# Altium PCB PCB1.PcbDoc
Units mm, origin at the board's own origin, x right, y up, seen from the top; angles counter-clockwise.
Board outline 100 x 70 mm, 2 copper layers (Top Layer, Bottom Layer); 33 components, 10 nets, 208 pads, 0 vias.
Unrouted connection lines stored in the file: 54.
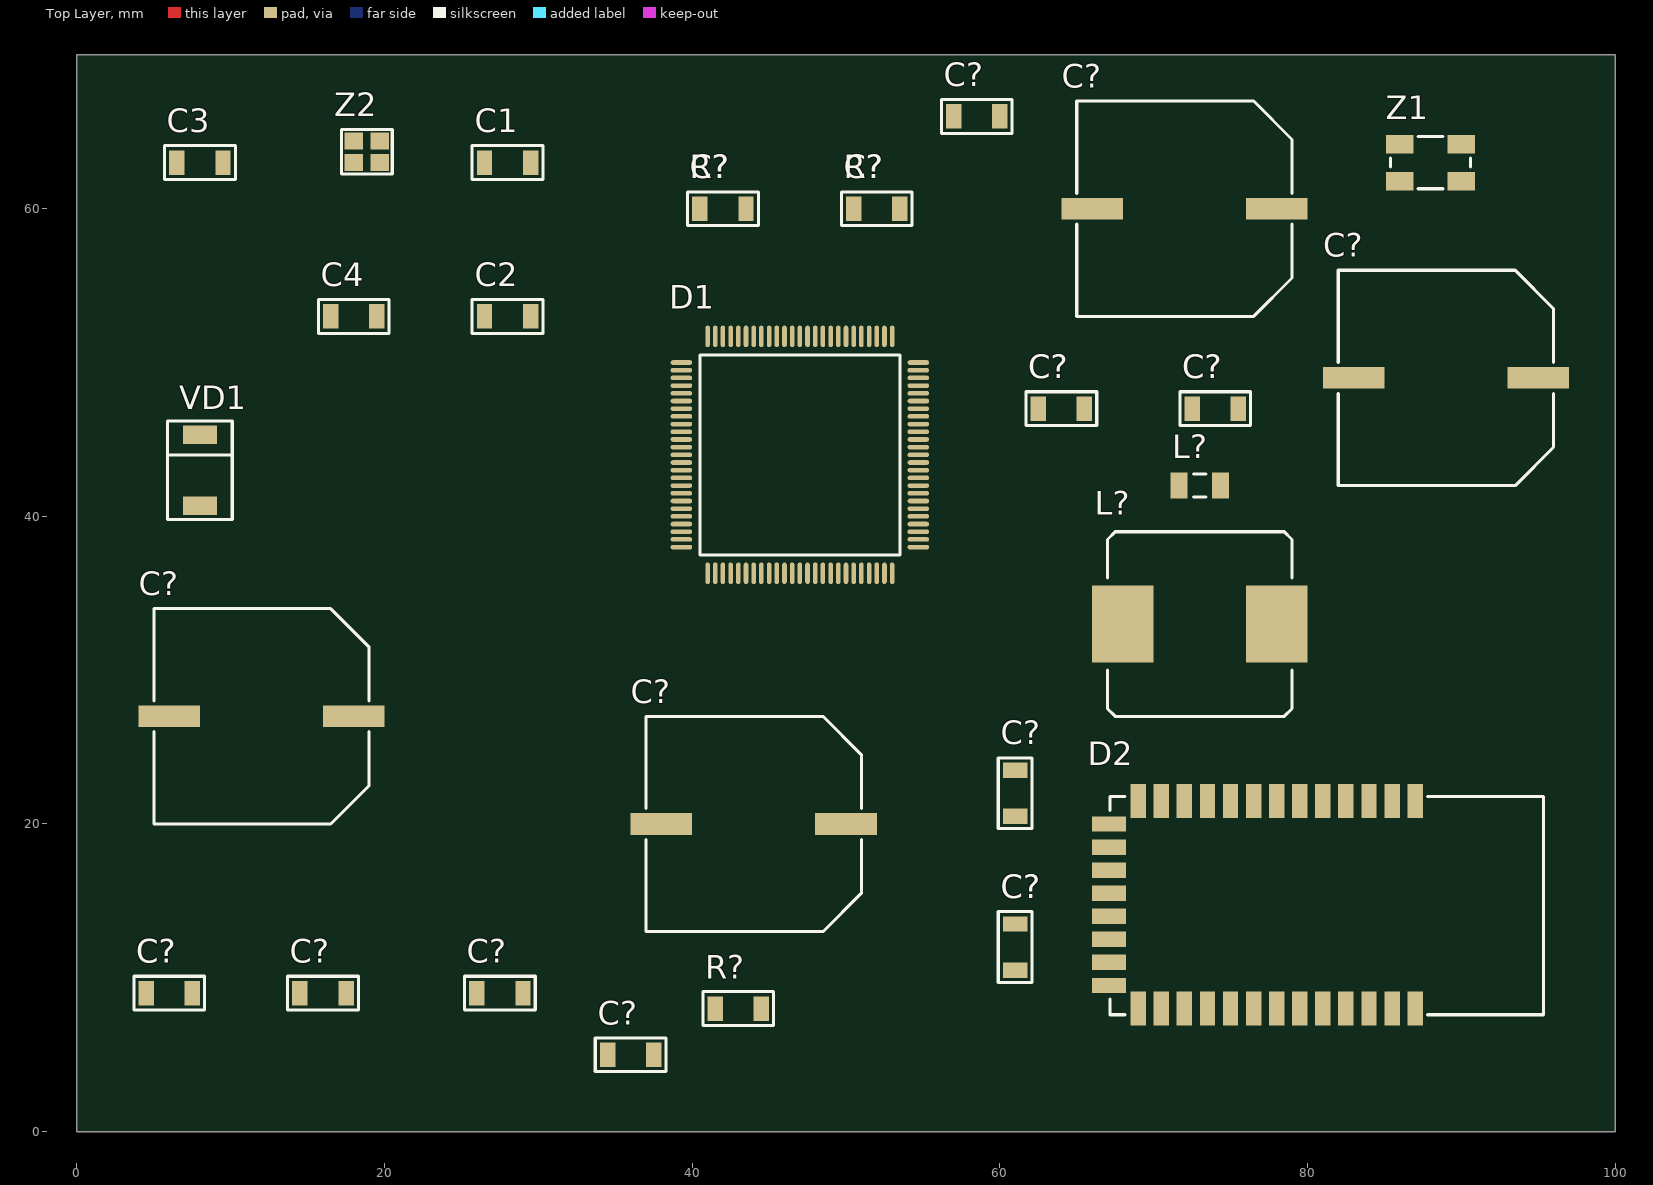
[diagram p0: Top Layer view]
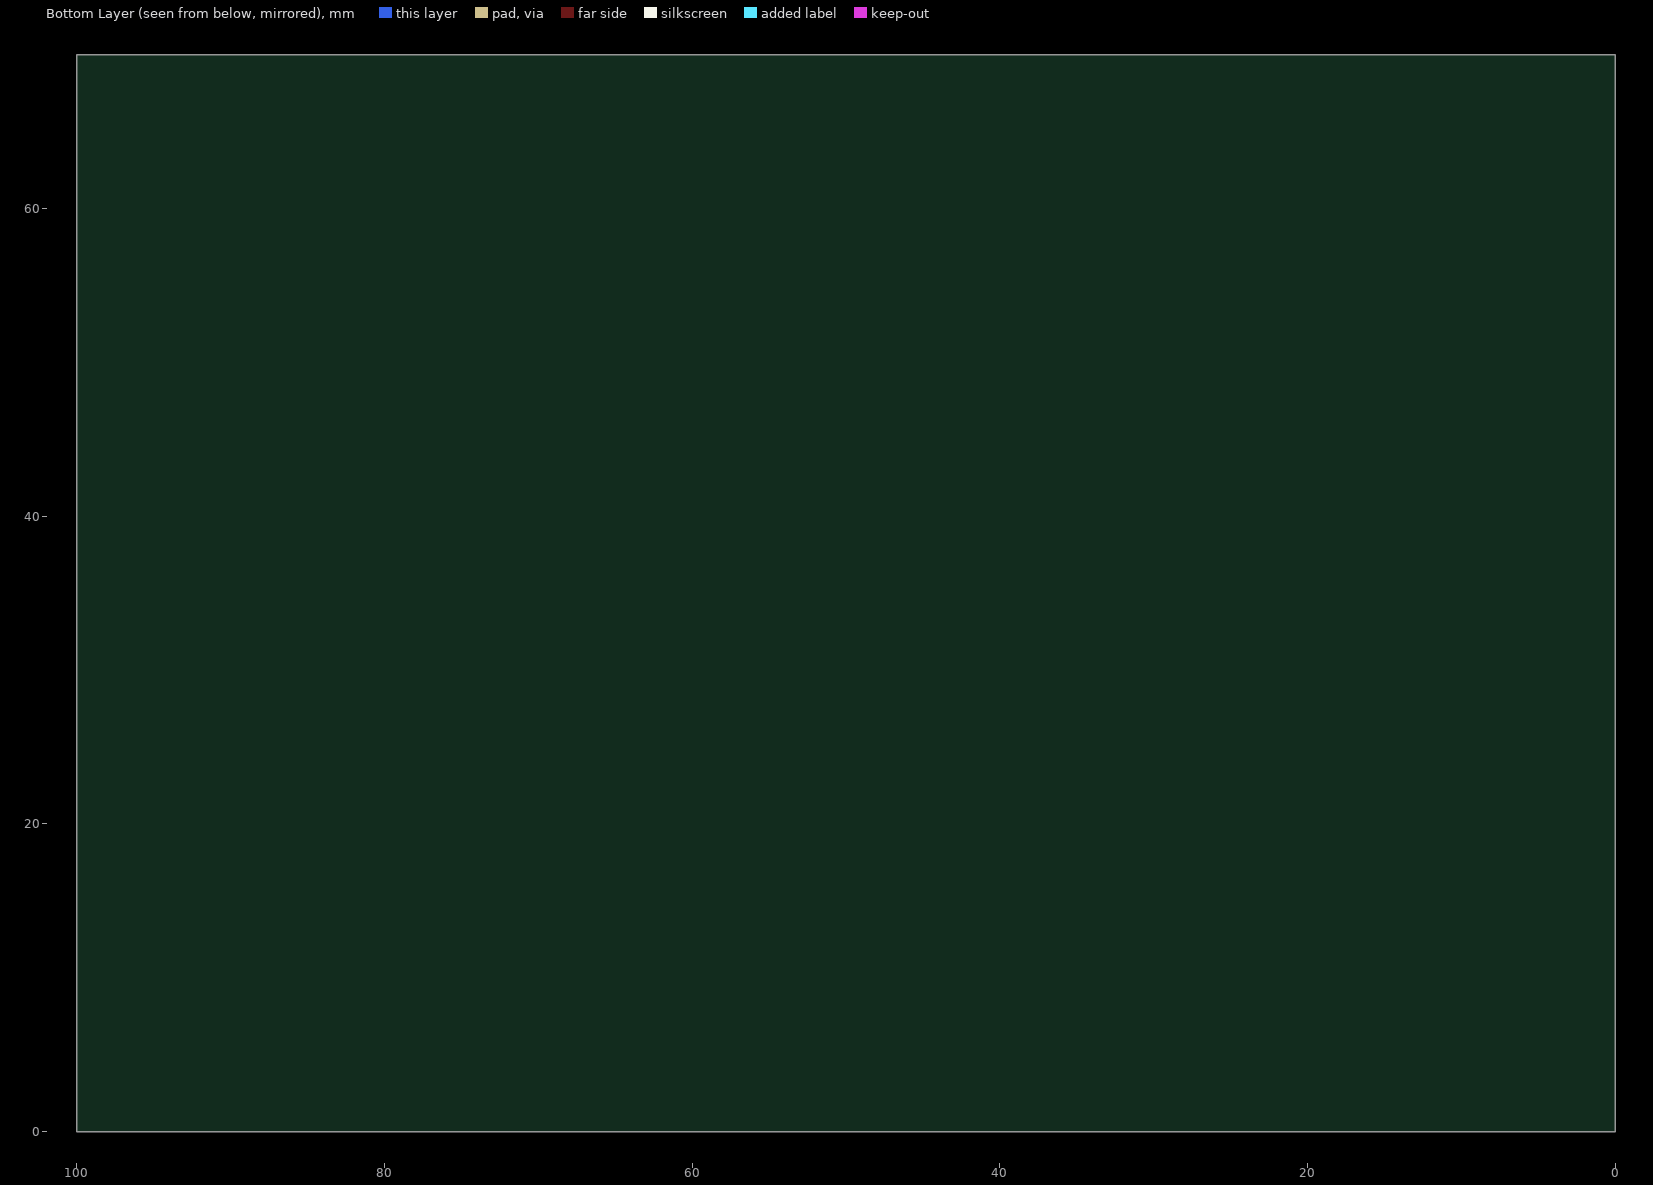
[diagram p1: Bottom Layer view, seen from below]

## Layer stack, top to bottom
Top Solder: solder mask 0.0102, Solder Resist, Dk 3.5
Top Layer: signal copper 0.0356
Dielectric 1: dielectric 0.32, FR-4, Dk 4.8
Bottom Layer: signal copper 0.0356
Bottom Solder: solder mask 0.0102, Solder Resist, Dk 3.5

## Board outline
0,0 0,70 100,70 100,0

## Design rules (kind name [scope] priority, off if disabled: settings)
Clearance [All] p1: gap=0.254 ignorepadtopadclearanceinfootprint=FALSE except(0: Arc-Hole Track-Hole SMDPad-Hole THPad-Hole Via-Hole Fill-Hole Poly-Hole Region-Hole Text-Hole)
PolygonConnect [All] p1: connectstyle=Relief reliefconductorwidth=0.254 reliefentries=4 polygonreliefangle="90 Angle" airgapwidth=0.254
RoutingVias [All] p1: holewidth=0.711 width=1.27 viastyle="Through Hole" minholewidth=0.711 minwidth=1.27 maxholewidth=0.711 maxwidth=1.27
SolderMaskExpansion [All] p1: expansion=0.102
Width [All] p1: maxlimit=0.254 minlimit=0.254 preferedwidth=0.254
30 further rules are at their usual default settings.

## Classes and differential pairs
component class Page1: C1 C2 C3 C4 C? D1 D2 L? R? VD1 Z1 Z2

## Components (designator, comment, footprint, x,y, rotation, side; value= is the part's Value field where it differs from the comment)
C1 "39pF" CH1206C 28,63 r0 top
C2 "39pF" CH1206C 28,53 r0 top
C3 "6.8pF" CH1206C 8,63 r0 top
C4 "6.8pF" CH1206C 18,53 r0 top
C? "0.47µF" CH1206C 52,60 r0 top
C? "47µF" CH1206C 58.5,66 r0 top
C? "220µF" "CAP: Alchip™- MVY" 89,49 r0 top
C? "100µF" "CAP: Alchip™- MVY" 44,20 r0 top
C? "5nF" CH1206C 42,60 r0 top
C? "2.2µF" CH1206C 6,9 r0 top
C? "2.2µF" CH1206C 16,9 r0 top
C? "100nF" CH1206C 36,5 r180 top
C? "100nF" CH1206C 64,47 r0 top
C? "100nF" CH1206C 61,12 r90 top
C? "100nF" CH1206C 64,47 r0 top
C? "100nF" CH1206C 61,12 r90 top
C? "100nF" CH1206C 74,47 r0 top
C? "100nF" CH1206C 61,22 r90 top
C? "1µF" CH1206C 74,47 r0 top
C? "1µF" "CAP: Alchip™- MVY" 12,27 r0 top
C? "1µF" "CAP: Alchip™- MVY" 72,60 r0 top
C? "100nF" CH1206C 27.5,9 r0 top
C? "100nF" CH1206C 6,9 r0 top
D1 "STM32F407VET6" 100-LQFP 47,44 r0 top
D2 "HC-06" "MOD: HC-05" 87,21.5 r270 top
L? "33µH" "IND: CDRH127" 73,33 r180 top
L? "BLM31PG500SN1L" C1206 73,42 r180 top value="Ferrite Bead"
R? "1k±1%" CH1206R 52,60 r0 top
R? "3k±0.1%" CH1206R 42,60 r0 top
R? "47" CH1206R 43,8 r180 top
VD1 "‎1N5822GOS-ND‎" DO221AA 8,43 r90 top
Z1 "24MHz" "OSC: 5032" 88,63 r0 top
Z2 "32.768KHZ" "OSC: 2520" 18,63 r0 top

## Footprints (in the part's own frame and the unit in brackets; to place one, negate y for a bottom-side part, rotate by r counter-clockwise, add the part's x,y. Pads: shape width x height; smd on the part's side, far side on the other; paste and mask are expansions set on the pad)
100-LQFP [mm] "Thin QFP, 100-Leads, Body 14x14mm, Pitch 0.5mm, IPC Medium Density"
  oval 1.4x0.3 smd: 1(-7.7,6) 2(-7.7,5.5) 3(-7.7,5) 4(-7.7,4.5) 5(-7.7,4) 6(-7.7,3.5) 7(-7.7,3) 8(-7.7,2.5) 9(-7.7,2) 10(-7.7,1.5) 11(-7.7,1) 12(-7.7,0.5) 13(-7.7,0) 14(-7.7,-0.5) 15(-7.7,-1) 16(-7.7,-1.5) 17(-7.7,-2) 18(-7.7,-2.5) 19(-7.7,-3) 20(-7.7,-3.5) 21(-7.7,-4) 22(-7.7,-4.5) 23(-7.7,-5) 24(-7.7,-5.5) 25(-7.7,-6) 51(7.7,-6) 52(7.7,-5.5) 53(7.7,-5) 54(7.7,-4.5) 55(7.7,-4) 56(7.7,-3.5) 57(7.7,-3) 58(7.7,-2.5) 59(7.7,-2) 60(7.7,-1.5) 61(7.7,-1) 62(7.7,-0.5) 63(7.7,0) 64(7.7,0.5) 65(7.7,1) 66(7.7,1.5) 67(7.7,2) 68(7.7,2.5) 69(7.7,3) 70(7.7,3.5) 71(7.7,4) 72(7.7,4.5) 73(7.7,5) 74(7.7,5.5) 75(7.7,6)
  oval 0.3x1.4 smd: 26(-6,-7.7) 27(-5.5,-7.7) 28(-5,-7.7) 29(-4.5,-7.7) 30(-4,-7.7) 31(-3.5,-7.7) 32(-3,-7.7) 33(-2.5,-7.7) 34(-2,-7.7) 35(-1.5,-7.7) 36(-1,-7.7) 37(-0.5,-7.7) 38(0,-7.7) 39(0.5,-7.7) 40(1,-7.7) 41(1.5,-7.7) 42(2,-7.7) 43(2.5,-7.7) 44(3,-7.7) 45(3.5,-7.7) 46(4,-7.7) 47(4.5,-7.7) 48(5,-7.7) 49(5.5,-7.7) 50(6,-7.7) 76(6,7.7) 77(5.5,7.7) 78(5,7.7) 79(4.5,7.7) 80(4,7.7) 81(3.5,7.7) 82(3,7.7) 83(2.5,7.7) 84(2,7.7) 85(1.5,7.7) 86(1,7.7) 87(0.5,7.7) 88(0,7.7) 89(-0.5,7.7) 90(-1,7.7) 91(-1.5,7.7) 92(-2,7.7) 93(-2.5,7.7) 94(-3,7.7) 95(-3.5,7.7) 96(-4,7.7) 97(-4.5,7.7) 98(-5,7.7) 99(-5.5,7.7) 100(-6,7.7)
  round 0.5 on Top Overlay: ""(-7.7,6.7)
  round 0.5 on Mech1: ""(-7.5,7.5)
  silkscreen extent -6.5,-6.5 6.5,6.5, body extent -8,-7.99 8,8.01, height 1.5
C1206 [mm] "Chip Capacitor, Body 3.2x1.6mm, IPC High Density"
  rect 1.1x1.7 smd: 1(-1.35,0) 2(1.35,0)
  silkscreen extent -0.4,-0.75 0.4,0.75, body extent -1.7,-0.9 1.7,0.9, height 1.3
"CAP: Alchip™- MVY" [mm]
  rect 4x1.4 smd: 1(6,0) 2(-6,0)
  silkscreen extent -7,-7 7,7, body extent -7.5,-6.85 7.5,6.85, height 14
CH1206C [mm] "Non polar chip capacitor, size 1206"
  rect 1x1.6 smd: 1(-1.5,0) 2(1.5,0)
  silkscreen extent -2.3,-1.1 2.3,1.1, body extent -1.6,-0.8 1.6,0.8, height 1
CH1206R [mm] "Chip Resistor, 2-Leads, Body 3,0x1,5mm, IPC Low Density"
  rect 1x1.6 smd: 1(-1.5,0) 2(1.5,0)
  silkscreen extent -2.3,-1.1 2.3,1.1, body extent -1.65,-0.8 1.55,0.8, height 0.47
DO221AA [mm]
  rect 1.2x2.2 smd: 1(-2.3,0) 2(2.3,0)
  silkscreen extent -3.2,-2.1 3.2,2.1, body extent -2.8,-1.97 2.8,1.98, height 1.1
"IND: CDRH127" [mm]
  rect 4x5 smd: 1(-5,0) 2(5,0)
  silkscreen extent -6,-6 6,6, body extent -6,-6 6,6, height 8.05
"MOD: HC-05" [mm] "Bluetooth 2.0 module"
  rect 2.2x1 smd: 1(0,0) 2(0,-1.5) 3(0,-3) 4(0,-4.5) 5(0,-6) 6(0,-7.5) 7(0,-9) 8(0,-10.5) 9(0,-12) 10(0,-13.5) 11(0,-15) 12(0,-16.5) 13(0,-18) 22(13.5,-18) 23(13.5,-16.5) 24(13.5,-15) 25(13.5,-13.5) 26(13.5,-12) 27(13.5,-10.5) 28(13.5,-9) 29(13.5,-7.5) 30(13.5,-6) 31(13.5,-4.5) 32(13.5,-3) 33(13.5,-1.5) 34(13.5,0)
  rect 1x2.2 smd: 14(1.5,-19.9) 15(3,-19.9) 16(4.5,-19.9) 17(6,-19.9) 18(7.5,-19.9) 19(9,-19.9) 20(10.5,-19.9) 21(12,-19.9)
  round 0.5 on Mech1: 33(0.3,1)
  round 0.5 on Top Overlay: 34(-0.8,1)
  silkscreen extent -0.3,-19.85 13.9,8.35, body extent -0.21,-19.76 13.81,8.25, height 2.35
"OSC: 2520" [mm]
  rect 1.2x1.1 smd: 1(0,0) 2(1.7,0) 3(1.7,1.4) 4(0,1.4)
  round 0.5 on Mech1: 5(-0.075,0.025)
  round 0.5 on Top Overlay: 6(-1.275,-0.6)
  silkscreen extent -0.8,-0.75 2.5,2.15, body extent -0.45,-0.35 2.15,1.75, height 0.55
"OSC: 5032" [mm]
  round 0.5 on Top Overlay: 1(-2.6,-2.2)
  rect 1.8x1.2 smd: 1(-2,-1.2) 2(2,-1.2) 3(2,1.2) 4(-2,1.2)
  round 0.5 on Mech1: ""(-2,-1.1)
  silkscreen extent -2.6,-1.7 2.6,1.7, body extent -2.5,-1.59 2.5,1.59, height 1.1

## Part data
C1 C2 C? C? C? C? C? C? C? C? C? C? C? C? C?: library part Capacitor, Manufacturer="Murata Electronics North America"
  C1 C2: ComponentKind="smd 1206, ±5%", HelpURL=https://www.digikey.com/product-detail/en/GRM31A5C2J390JW01D/490-11624-1-ND/5333464/?itemSeq=291825591, Model=GRM31A5C2J390JW01D
  C?: ComponentKind="1206 ±10%", HelpURL=https://www.digikey.com/product-detail/en/murata-electronics-north-america/GRT31CR61A476KE13L/490-12438-1-ND/5417139, Model=GRT31CR61A476KE13L
  C? C?: ComponentKind=1206, HelpURL=https://www.digikey.com/product-detail/en/murata-electronics-north-america/GCJ31MR71E225KA12L/490-16467-1-ND/7363449, Model=GCJ31MR71E225KA12L
  C? C? C? C? C? C? C? C? C?: ComponentKind=1206, HelpURL=https://www.digikey.com/product-detail/en/GRM31M7U1H104JA01L/490-6524-1-ND/3845721/?itemSeq=292160367, Model=GRM31M7U1H104JA01L
  C?: ComponentKind=1206, HelpURL=https://www.digikey.com/product-detail/en/GCJ31MR71H105KA12L/490-5810-1-ND/2783833/?itemSeq=292160649, Model=GCJ31MR71H105KA12L
C3 C4 C?: library part Capacitor, Manufacturer="Wurth Electronics Inc."
  C3 C4: ComponentKind="1206, ±0.5pF", HelpURL=https://www.digikey.com/product-detail/en/wurth-electronics-inc/885012008036/732-7880-1-ND/5454507, Model=885012008036
  C?: ComponentKind="1206 ±10%", HelpURL=https://www.digikey.com/product-detail/en/wurth-electronics-inc/885012208034/732-7690-1-ND/5454317, Model=885012208034
C? C? C? C?: library part AlumCap, Manufacturer="United Chemi-Con"
  C?: ComponentKind="Alchip™- MVY 220µF 35V ±20%", HelpURL=https://www.digikey.com/product-detail/en/EMVY350ADA221MHA0G/565-2478-1-ND/757639/?itemSeq=292025914, Model=EMVY350ADA221MHA0G
  C?: ComponentKind="Alchip™- MVY 100UF 20% 35V SMD", HelpURL=https://www.digikey.com/product-detail/en/EMVY350ADA101MHA0G/565-2477-1-ND/757638/?itemSeq=292025191, Model=EMVY350ADA101MHA0G
  C? C?: ComponentKind="Alchip™- MVY", HelpURL=https://www.digikey.com/product-detail/en/EMVY500ADA1R0MD55G/565-2486-1-ND/757647/?itemSeq=292161065, Model=EMVY500ADA1R0MD55G
C?: library part Capacitor, Manufacturer=KEMET, ComponentKind="NP0 1206", HelpURL=https://www.digikey.com/product-detail/en/kemet/C1206C509D5GAC7800/399-14695-1-ND/7103987, Model=C1206C509D5GAC7800
D1: "Cortex-M4", Manufacturer=STMicroelectronics, ComponentKind=100-LQFP, HelpURL=https://www.digikey.com/product-detail/en/STM32F407VGT6/497-11605-ND/2747117/?itemSeq=291825751, Model=STM32F407VGT6
D2: "Bluetooth", Manufacturer=China, ComponentKind="Bluetooth 2.4GHz", HelpURL=https://ru.aliexpress.com/wholesale?minPrice=&maxPrice=&isBigSale=n&isFreeShip=y&isNew=n&isFavorite=n&isMobileExclusive=n&isLocalReturn=n&shipFromCountry=&shipCompanies=&SearchText=HC-06&CatId=0&initiative_id=SB_20170806222546&needQuery=y, Model=HC-06
L?: library part Inductor, Manufacturer="Wurth Electronics Inc.", ComponentKind="Nonstandard 1210 (12.00mm x 12.00mm)", HelpURL=https://www.digikey.com/product-detail/en/wurth-electronics-inc/7447709330/732-1244-1-ND/1639305, Model=7447709330
L?: library part Inductor, Manufacturer="Murata Electronics North America", ComponentKind="Power Line Ferrite Bead", HelpURL=https://www.digikey.com/product-detail/en/murata-electronics-north-america/BLM31PG500SN1L/490-1055-1-ND/584501, Model=BLM31PG500SN1L
R? R?: library part Resistor, Manufacturer="Vishay Dale", ComponentKind=1206
  R?: HelpURL=https://www.digikey.com/product-detail/en/vishay-dale/CRCW12061K00FKEA/541-1.00KFCT-ND/1181760, Model=CRCW12061K00FKEA
  R?: HelpURL=https://www.digikey.com/product-detail/en/vishay-dale/TNPW12063K00BEEA/541-9877-1-ND/9659145, Model=TNPW12063K00BEEA
R?: library part Resistor
VD1: library part "Diod Schottky", Manufacturer="ON Semiconductor", ComponentKind="Äèîä Øîòòêè äëÿ çàùèòû îò íåïðàâèëüíîé ïîëÿðíîñòè", HelpURL=https://www.digikey.com/ordering/shoppingcart, Model=?1N5822GOS-ND?
Z1: library part Oscillator, Manufacturer="Abracon LLC", ComponentKind=ABM3B, HelpURL=https://www.digikey.com/product-detail/en/abracon-llc/ABM3B-24.000MHZ-D-1-W-T/535-13449-1-ND/5980125, Model=ABM3B-24.000MHZ-D-1-W-T
Z2: library part Oscillator, Manufacturer="Epson Toyocom", ComponentKind="MC-306 6pF", HelpURL=https://www.digikey.com/product-detail/en/epson/MC-306-32.768K-E3-ROHS/SER2417CT-ND/1532560, Model="MC-306 32.768K-E3:ROHS"

## Nets (pads, with @x,y where several pads share a name; then routed paths per layer and width w, separated by ;. In a path a pad name is that pad's centre, name@x,y a point inside that pad or via, vN(x,y) a via of type N, cw(c..) or ccw(c..) an arc to the next point about the centre after c; other vN are vias at no path point)
3V3: C?.1@57,66 C?.2@34.5,5 C?.2@61,13.5 C?.2@61,23.5 C?.2@65.5,47 C?.2@75.5,47 D1.6 D1.11 D1.19 D1.28 D1.50 D1.75 D1.100
5V: C?.1@40.5,60 C?.1@50.5,60 C?.1@95,49 L?.1 R?.1@40.5,60
GND: C1.1 C2.1 C3.1 C4.1 C?.1@4.5,9 C?.1@14.5,9 C?.1@26,9 C?.1@37.5,5 C?.1@61,10.5 C?.1@61,20.5 C?.1@62.5,47 C?.1@72.5,47 C?.2@6,27 C?.2@7.5,9 C?.2@38,20 C?.2@53.5,60 C?.2@60,66 C?.2@66,60 C?.2@83,49 D1.10 D1.20 D1.27 D1.74 D1.99 R?.2@53.5,60 VD1.1
NetC1_2: C1.2 D1.13 Z1.1@86,61.8
NetC2_2: C2.2 D1.12 Z1.2
NetC3_2: C3.2 D1.8 Z2.1
NetC4_2: C4.2 D1.9 Z2.4
NetC?_1: C?.1@18,27 C?.2@29,9 D1.21 R?.2@41.5,8
NetC?_2: C?.2@7.5,9 D1.73
NetD?_2: L?.2 VD1.2
pads on no net: C?.1@4.5,9 C?.1@50,20 C?.1@78,60 C?.2@17.5,9 C?.2@43.5,60 D1. D1.1 D1.2 D1.3 D1.4 D1.5 D1.7 D1.14 D1.15 D1.16 D1.17 D1.18 D1.22 D1.23 D1.24 D1.25 D1.26 D1.29 D1.30 D1.31 D1.32 D1.33 D1.34 D1.35 D1.36 D1.37 D1.38 D1.39 D1.40 D1.41 D1.42 D1.43 D1.44 D1.45 D1.46 D1.47 D1.48 D1.49 D1.51 D1.52 D1.53 D1.54 D1.55 D1.56 D1.57 D1.58 D1.59 D1.60 D1.61 D1.62 D1.63 D1.64 D1.65 D1.66 D1.67 D1.68 D1.69 D1.70 D1.71 D1.72 D1.76 D1.77 D1.78 D1.79 D1.80 D1.81 D1.82 D1.83 D1.84 D1.85 D1.86 D1.87 D1.88 D1.89 D1.90 D1.91 D1.92 D1.93 D1.94 D1.95 D1.96 D1.97 D1.98 D2.1 D2.2 D2.3 D2.4 D2.5 D2.6 D2.7 D2.8 D2.9 D2.10 D2.11 D2.12 D2.13 D2.14 D2.15 D2.16 D2.17 D2.18 D2.19 D2.20 D2.21 D2.22 D2.23 D2.24 D2.25 D2.26 D2.27 D2.28 D2.29 D2.30 D2.31 D2.32 D2.33 D2.34 R?.1@44.5,8 R?.1@50.5,60 R?.2@43.5,60 Z1. Z1.1@85.4,60.8 Z1.3 Z1.4 Z2.2 Z2.3 Z2.5 Z2.6

## Silkscreen, mask and mechanical layers (free items; w line width, h text height)
Drill Drawing:
  the board outline again, w0.2

## Dimensions
0,70 to 100,70 on Size
0,70 to 0,0 on Size